# Altium PCB LI-PR_new.PcbDoc
Units mm, origin at the board's own origin, x right, y up, seen from the top; angles counter-clockwise.
Board outline 61.59 x 27.3 mm, 2 copper layers (Top Layer, Bottom Layer); 15 components, 10 nets, 51 pads, 502 vias.
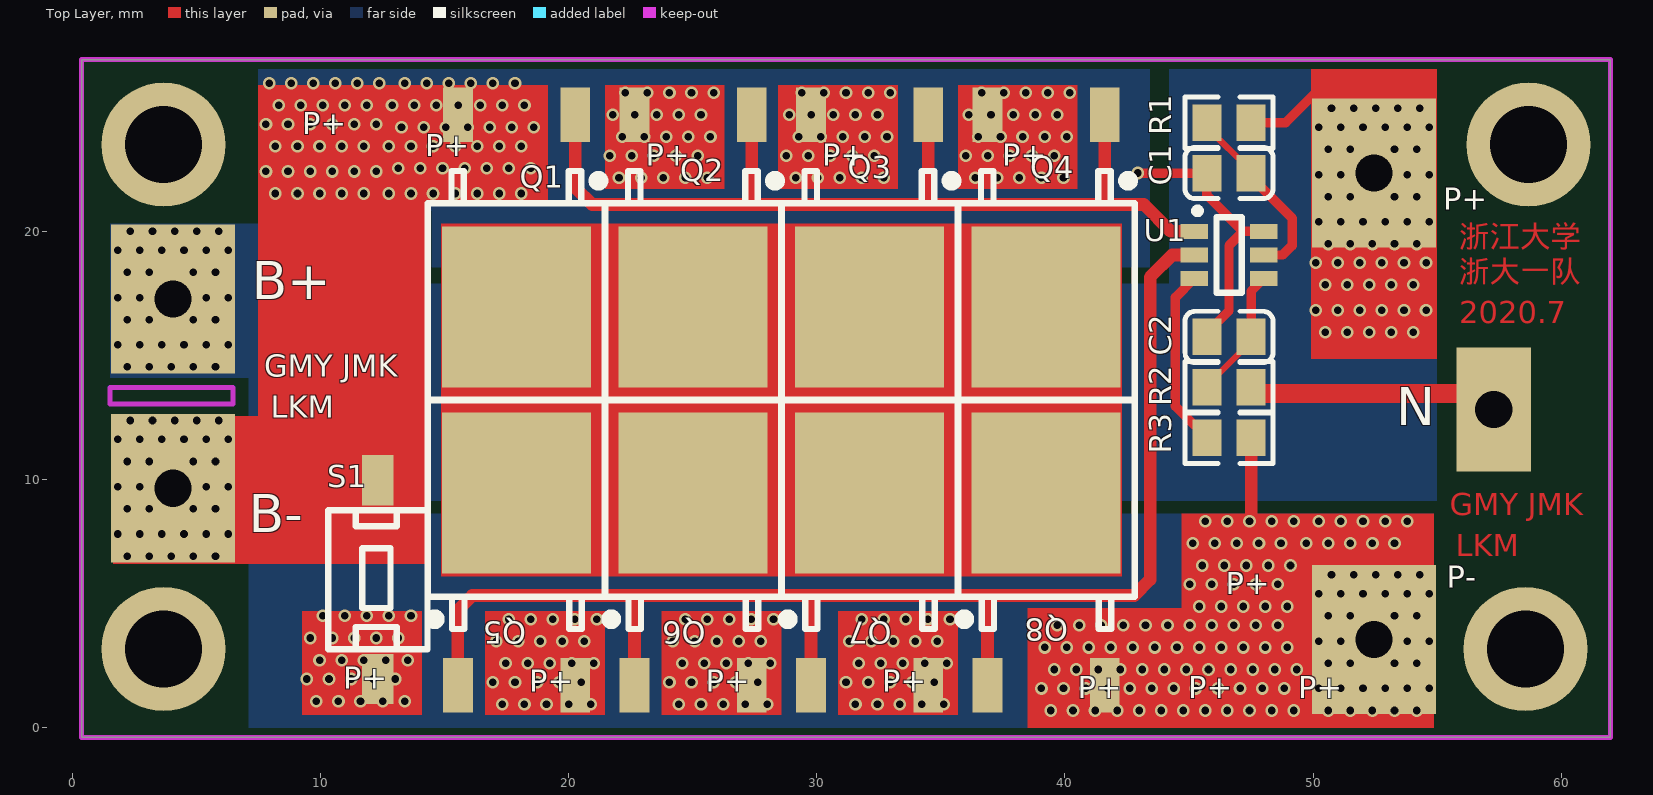
[diagram p0: Top Layer view]
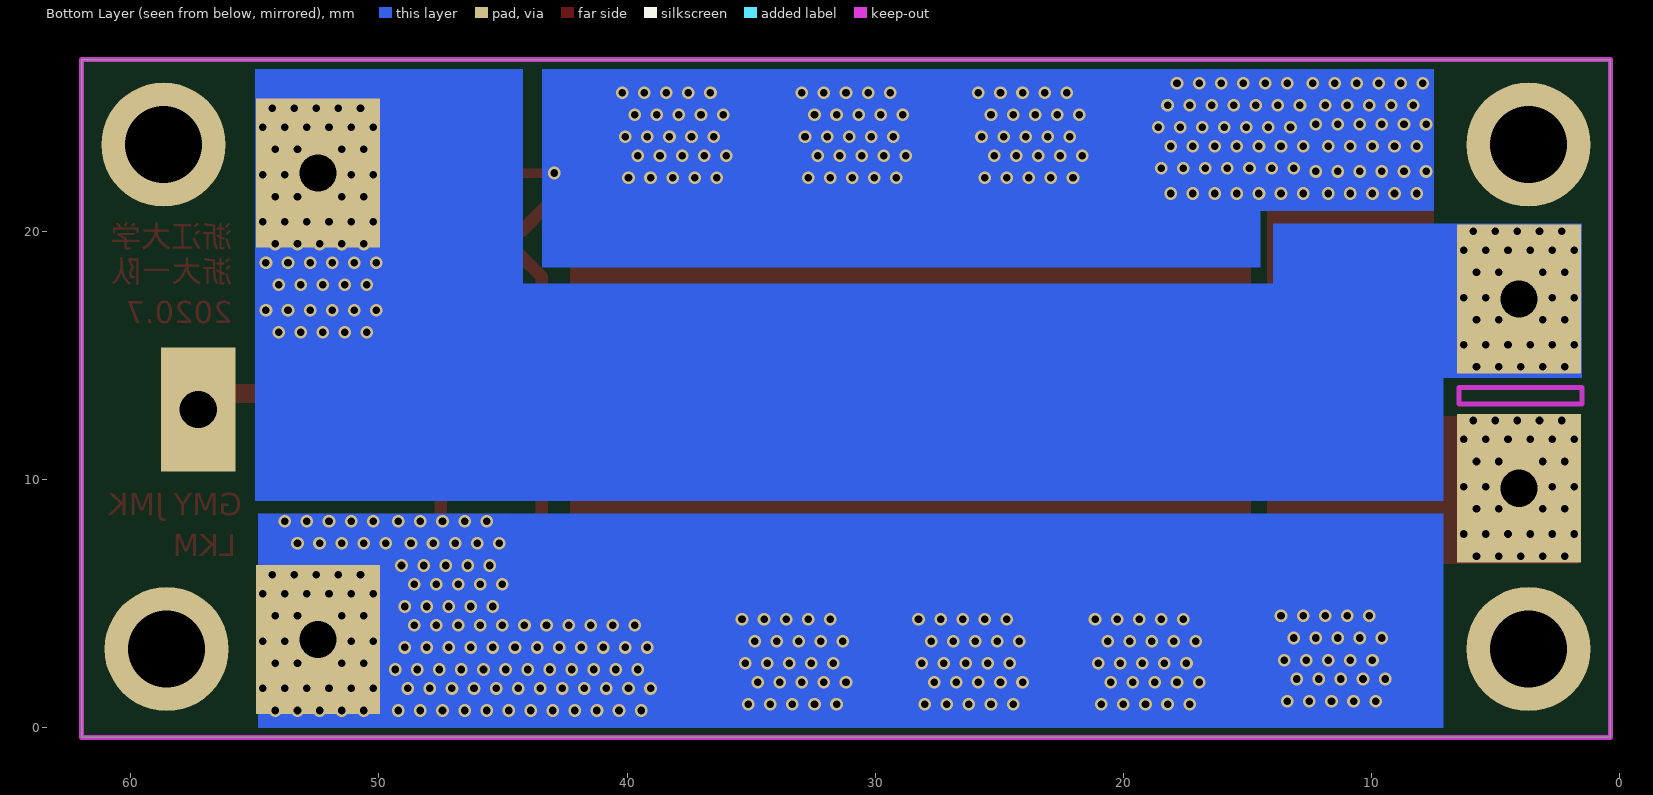
[diagram p1: Bottom Layer view, seen from below]

## Layer stack, top to bottom
Top Solder: solder mask 0.0102, Solder Resist, Dk 3.5
Top Layer: signal copper 0.0356
Dielectric1: dielectric 0.32, FR-4, Dk 4.8
Bottom Layer: signal copper 0.0356
Bottom Solder: solder mask 0.0102, Solder Resist, Dk 3.5

## Board outline
0.381,-0.381 0.381,26.924 61.976,26.924 61.976,-0.381

## Design rules (kind name [scope] priority, off if disabled: settings)
Clearance [All] p1: gap=0.254 ignorepadtopadclearanceinfootprint=FALSE except(0: Arc-Hole Track-Hole SMDPad-Hole THPad-Hole Via-Hole Fill-Hole Poly-Hole Region-Hole Text-Hole)
ComponentClearance [All] p1 off: gap=0.254 collisioncheckmode=3 verticalgap=2540 showdistances=FALSE
FabricationTestPointUsage TestPointUsage [All] p1: valid=0 allowmultiple=FALSE
FabricationTestpoint Testpoint [All] p1: side=3 testpointundercomponent=TRUE minsize=1.016 maxsize=2.54 preferedsize=1.524 minholesize=0 maxholesize=1.016 preferedholesize=0.813 testpointgrid=0.025 allowsidetop=TRUE allowsidebottom=TRUE usegrid=TRUE gridtolerance=0
MinimumSolderMaskSliver [All] p1: minsoldermaskwidth=0.076
PolygonConnect [All] p1: connectstyle=Relief reliefconductorwidth=0.254 reliefentries=4 polygonreliefangle="90 Angle" airgapwidth=0.254
RoutingVias [All] p1: holewidth=0.711 width=1.27 viastyle="Through Hole" minholewidth=0.254 minwidth=0.254 maxholewidth=2.54 maxwidth=2.54
SilkToSilkClearance [All] p1: silktosilkclearance=0
SilkToSolderMaskClearance SilkscreenOverComponentPads [IsPad] p1: minsilkscreentomaskgap=0 clearancetoexposedcopper=TRUE
SolderMaskExpansion [All] p1: expansion=0.102
Width [All] p1: maxlimit=25.4 minlimit=0.254 preferedwidth=0.254 minimp=50.000000 maximp=50.000000 favimp=50.000000
24 further rules are at their usual default settings.

## Components (designator, comment, footprint, x,y, rotation, side; value= is the part's Value field where it differs from the comment)
C1 "0.1u" CAP_0805C 46.609,22.352 r0 top
C2 "0.1u" CAP_0805C 46.609,15.748 r0 top
Q1 "3080N" 252-2 17.907,17.526 r0 top
Q2 "3080N" 252-2 25.019,17.526 r0 top
Q3 "3080N" 252-2 32.131,17.526 r0 top
Q4 "3080N" 252-2 39.243,17.526 r0 top
Q5 "3080N" 252-2 17.907,8.89 r180 top
Q6 "3080N" 252-2 25.019,8.89 r180 top
Q7 "3080N" 252-2 32.131,8.89 r180 top
Q8 "3080N" 252-2 39.243,8.89 r180 top
R1 "R" R_0805R 46.609,24.384 r180 top
R2 "R" R_0805R 46.609,13.716 r180 top
R3 "R" R_0805R 46.609,11.684 r180 top
S1 "SW_PB" SW_BP 12.319,5.969 r270 top
U1 "HY2120" SOT-23-6 46.609,19.304 r0 top

## Footprints (in the part's own frame and the unit in brackets; to place one, negate y for a bottom-side part, rotate by r counter-clockwise, add the part's x,y. Pads: shape width x height; smd on the part's side, far side on the other; paste and mask are expansions set on the pad)
252-2 [mm]
  rect 1.2x2.2 smd: 1(2.362,7.178) 3(-2.362,7.173)
  rect 6x6.5 smd: 2(0,-0.574)
  silkscreen extent -3.57,-4.34 3.57,4.91
CAP_0805C [mm]
  rect 1.16x1.47 smd mask+0: 1(-0.89,0) 2(0.89,0)
  silkscreen extent -1.77,-1.04 1.77,1.04, body extent -1,-0.62 1,0.63, height 0.77
R_0805R [mm]
  rect 1.16x1.47 smd mask+0: 1(-0.89,0) 2(0.89,0)
  silkscreen extent -1.77,-1.04 1.77,1.03, body extent -1,-0.62 1,0.63, height 0.49
SOT-23-6 [mm]
  rect 1.1x0.6 smd: 1(-1.4,0.696) 2(-1.4,-0.254) 3(-1.4,-1.204) 4(1.4,-1.204) 5(1.4,-0.254) 6(1.4,0.696)
  silkscreen extent -1.4,-1.78 0.51,1.65
SW_BP [mm]
  rect 2.032x1.27 smd: 1(-4,0) 2(4,0)
  silkscreen extent -2.8,-2 2.8,2

## Part data
C1 C2: library part CAP2
Q1 Q2 Q3 Q4 Q5 Q6 Q7 Q8: library part LR7843
R1 R2 R3: library part Res2

## Free pads (board coordinates)
  round 5 hole 3.1: 0(3.683,23.495) 0(58.547,3.175) 0(58.674,23.495) 1(3.683,3.175)
  rect 5x6 hole 1.5: 3(4.064,9.652) 3(4.064,17.272) 3(52.451,3.556) 3(52.451,22.352)
  rect 3x5 hole 1.5: 3(57.277,12.827)

## Via types
v1: diameter 0.508, hole 0.305, Top Layer to Bottom Layer, 502 vias

## Nets (pads, with @x,y where several pads share a name; then routed paths per layer and width w, separated by ;. In a path a pad name is that pad's centre, name@x,y a point inside that pad or via, vN(x,y) a via of type N, cw(c..) or ccw(c..) an arc to the next point about the centre after c; other vN are vias at no path point)
B-: C1.1 C2.1 pad.3@4.064,9.652 Q1.3 Q2.3 Q3.3 Q4.3 S1.1 U1.6 | length 11.4
  Top Layer w0.381: v1(42.926,22.352) C1.1 45.719,21.459 47.178,20 ; C2.1 45.719,15.912 46.609,16.802 46.609,19.431 47.178,20 ; U1.6 47.178,20
  other v1: 2.222,6.921 3.111,6.921 4,6.921 4.889,6.921 5.779,6.921 1.841,7.81 2.73,7.81 3.619,7.81 4.508,7.81 5.397,7.81 6.286,7.81 2.222,8.826 3.111,8.826 4.889,8.826 5.779,8.826 1.841,9.716 2.73,9.716 5.397,9.716 6.286,9.716 2.222,10.731 3.111,10.731 4.889,10.731 5.779,10.731 1.841,11.62 2.73,11.62 3.619,11.62 4.508,11.62 5.397,11.62 6.286,11.62 2.349,12.383 3.238,12.383 4.127,12.383 5.016,12.383 5.905,12.383 8.191,21.526 9.08,21.526 9.97,21.526 10.858,21.526 11.747,21.526 12.763,21.526 13.652,21.526 14.541,21.526 15.43,21.526 16.319,21.526 17.209,21.526 18.098,21.526 22.034,22.162 22.924,22.162 23.812,22.162 24.701,22.162 25.59,22.162 29.146,22.162 30.035,22.162 30.924,22.162 31.813,22.162 32.703,22.162 36.386,22.162 37.274,22.162 38.163,22.162 39.052,22.162 39.941,22.162 7.81,22.415 8.7,22.415 9.588,22.415 10.477,22.415 11.367,22.415 12.255,22.415 13.144,22.543 14.034,22.543 14.922,22.543 15.811,22.543 16.7,22.543 17.59,22.543 18.479,22.543 21.653,23.05 22.543,23.05 23.431,23.05 24.32,23.05 25.209,23.05 28.765,23.05 29.654,23.05 30.543,23.05 31.432,23.05 32.322,23.05 36.005,23.05 36.893,23.05 37.782,23.05 38.672,23.05 39.56,23.05 8.191,23.431 9.08,23.431 9.97,23.431 10.858,23.431 11.747,23.431 12.763,23.431 13.652,23.431 14.541,23.431 15.43,23.431 16.319,23.431 17.209,23.431 18.098,23.431 22.162,23.812 23.05,23.812 23.939,23.812 24.828,23.812 25.717,23.812 29.273,23.812 30.162,23.812 31.051,23.812 31.941,23.812 32.829,23.812 36.512,23.812 37.401,23.812 38.291,23.812 39.179,23.812 40.069,23.812 13.271,24.194 14.16,24.194 15.05,24.194 15.938,24.194 16.828,24.194 17.716,24.194 18.605,24.194 7.81,24.32 8.7,24.32 9.588,24.32 10.477,24.32 11.367,24.32 12.255,24.32 21.78,24.701 22.669,24.701 23.558,24.701 24.447,24.701 25.336,24.701 28.892,24.701 29.781,24.701 30.67,24.701 31.559,24.701 32.448,24.701 36.131,24.701 37.02,24.701 37.91,24.701 38.798,24.701 39.688,24.701 8.319,25.082 9.207,25.082 10.096,25.082 10.986,25.082 11.874,25.082 12.89,25.082 13.779,25.082 14.668,25.082 15.557,25.082 16.447,25.082 17.335,25.082 18.224,25.082 22.288,25.59 23.177,25.59 24.066,25.59 24.956,25.59 25.845,25.59 29.4,25.59 30.29,25.59 31.178,25.59 32.067,25.59 32.956,25.59 36.639,25.59 37.529,25.59 38.417,25.59 39.306,25.59 40.195,25.59 7.938,25.971 8.826,25.971 9.716,25.971 10.604,25.971 11.493,25.971 12.383,25.971 13.399,25.971 14.287,25.971 15.176,25.971 16.066,25.971 16.954,25.971 17.843,25.971
N: pad.3@57.277,12.827 R2.1 | length 10.1
  Top Layer w0.762: R2.1 47.753,13.462 56.642,13.462 pad.3@57.277,12.827
NetC1_2: C1.2 R1.2 U1.5 | length 7.3
  Top Layer w0.254: R1.2@45.719,24.206 47.499,22.426 C1.2
  Top Layer w0.381: C1.2@47.499,22.187 49.149,20.537 49.149,19.431 48.768,19.05 U1.5
NetC2_2: C2.2 R2.2 U1.4 | length 5.2
  Top Layer w0.254: R2.2 45.719,13.79 C2.2@47.499,15.57
  Top Layer w0.381: C2.2 47.499,17.59 U1.4
NetQ1_1: Q1.1 Q2.1 Q3.1 Q4.1 U1.1 | length 39.5
  Top Layer w0.508: Q1.1 20.269,21.768 20.955,21.082 43.18,21.082 44.262,20 U1.1 ; 27.381,21.082 Q2.1 ; 34.493,21.082 Q3.1 ; 41.605,21.082 Q4.1
NetQ1_2: Q1.2 Q2.2 Q3.2 Q4.2 Q5.2 Q6.2 Q7.2 Q8.2
NetQ5_1: Q5.1 Q6.1 Q7.1 Q8.1 U1.2 | length 56.6
  Top Layer w0.508: Q5.1 15.545,4.75 16.129,5.334 42.799,5.334 43.434,5.969 43.434,18.161 44.323,19.05 U1.2 ; Q6.1 22.657,5.334 ; Q7.1 29.769,5.334 ; Q8.1 36.881,5.334
NetR3_2: R3.2 U1.3 | length 7.3
  Top Layer w0.381: U1.3 44.45,17.341 44.45,12.953 R3.2
P+: pad.3@4.064,17.272 pad.3@52.451,22.352 R1.1 | length 3.2
  Top Layer w0.381: R1.1 48.895,24.384 50.165,25.654
  other v1: 2.222,14.541 3.111,14.541 4,14.541 4.889,14.541 5.779,14.541 1.841,15.43 2.73,15.43 3.619,15.43 4.508,15.43 5.397,15.43 6.286,15.43 50.482,15.938 51.371,15.938 52.261,15.938 53.149,15.938 54.038,15.938 2.222,16.447 3.111,16.447 4.889,16.447 5.779,16.447 50.102,16.828 50.99,16.828 51.88,16.828 52.768,16.828 53.657,16.828 54.546,16.828 1.841,17.335 2.73,17.335 5.397,17.335 6.286,17.335 50.482,17.843 51.371,17.843 52.261,17.843 53.149,17.843 54.038,17.843 2.222,18.351 3.111,18.351 4.889,18.351 5.779,18.351 50.102,18.732 50.99,18.732 51.88,18.732 52.768,18.732 53.657,18.732 54.546,18.732 1.841,19.241 2.73,19.241 3.619,19.241 4.508,19.241 5.397,19.241 6.286,19.241 50.609,19.494 51.498,19.494 52.387,19.494 53.276,19.494 54.165,19.494 2.349,20.002 3.238,20.002 4.127,20.002 5.016,20.002 5.905,20.002 50.228,20.383 51.117,20.383 52.006,20.383 52.895,20.383 53.785,20.383 54.673,20.383 50.609,21.399 51.498,21.399 53.276,21.399 54.165,21.399 50.228,22.288 51.117,22.288 53.785,22.288 54.673,22.288 50.609,23.304 51.498,23.304 53.276,23.304 54.165,23.304 50.228,24.194 51.117,24.194 52.006,24.194 52.895,24.194 53.785,24.194 54.673,24.194 50.736,24.956 51.625,24.956 52.514,24.956 53.404,24.956 54.292,24.956
P-: pad.3@52.451,3.556 Q5.3 Q6.3 Q7.3 Q8.3 R3.1 S1.2 | length 3.7
  Top Layer w0.508: 47.499,8.002 R3.1
  other v1: 39.433,0.699 40.322,0.699 41.212,0.699 42.1,0.699 42.989,0.699 43.878,0.699 44.767,0.699 45.657,0.699 46.545,0.699 47.434,0.699 48.323,0.699 49.212,0.699 50.609,0.699 51.498,0.699 52.387,0.699 53.276,0.699 54.165,0.699 17.335,0.953 18.224,0.953 19.113,0.953 20.002,0.953 20.892,0.953 24.447,0.953 25.336,0.953 26.226,0.953 27.114,0.953 28.003,0.953 31.559,0.953 32.448,0.953 33.337,0.953 34.227,0.953 35.115,0.953 9.842,1.079 10.731,1.079 11.62,1.079 12.509,1.079 13.399,1.079 39.052,1.587 39.941,1.587 40.831,1.587 41.719,1.587 42.608,1.587 43.497,1.587 44.386,1.587 45.276,1.587 46.164,1.587 47.053,1.587 47.942,1.587 48.831,1.587 50.228,1.587 51.117,1.587 52.006,1.587 52.895,1.587 53.785,1.587 54.673,1.587 16.954,1.841 17.843,1.841 18.732,1.841 19.621,1.841 20.511,1.841 24.066,1.841 24.956,1.841 25.845,1.841 26.733,1.841 27.622,1.841 31.178,1.841 32.067,1.841 32.956,1.841 33.846,1.841 34.734,1.841 9.461,1.968 10.351,1.968 11.239,1.968 12.128,1.968 13.018,1.968 39.56,2.349 40.45,2.349 41.338,2.349 42.227,2.349 43.116,2.349 44.005,2.349 44.895,2.349 45.783,2.349 46.672,2.349 47.561,2.349 48.45,2.349 49.34,2.349 17.462,2.603 18.351,2.603 19.241,2.603 20.13,2.603 21.018,2.603 24.575,2.603 25.463,2.603 26.352,2.603 27.241,2.603 28.13,2.603 31.686,2.603 32.575,2.603 33.465,2.603 34.353,2.603 35.242,2.603 50.609,2.603 51.498,2.603 53.276,2.603 54.165,2.603 9.97,2.73 10.858,2.73 11.747,2.73 12.636,2.73 13.525,2.73 39.179,3.238 40.069,3.238 40.957,3.238 41.846,3.238 42.735,3.238 43.624,3.238 44.514,3.238 45.402,3.238 46.291,3.238 47.18,3.238 48.069,3.238 48.959,3.238 17.081,3.492 17.97,3.492 18.86,3.492 19.748,3.492 20.637,3.492 24.194,3.492 25.082,3.492 25.971,3.492 26.86,3.492 27.749,3.492 31.305,3.492 32.194,3.492 33.084,3.492 33.972,3.492 34.861,3.492 50.228,3.492 51.117,3.492 53.785,3.492 54.673,3.492 9.588,3.619 10.477,3.619 11.367,3.619 12.255,3.619 13.144,3.619 39.688,4.127 40.576,4.127 41.465,4.127 42.355,4.127 43.243,4.127 44.133,4.127 45.021,4.127 45.91,4.127 46.799,4.127 47.688,4.127 48.578,4.127 17.59,4.381 18.479,4.381 19.367,4.381 20.256,4.381 21.145,4.381 24.701,4.381 25.59,4.381 26.479,4.381 27.368,4.381 28.258,4.381 31.813,4.381 32.703,4.381 33.591,4.381 34.48,4.381 35.369,4.381 10.096,4.508 10.986,4.508 11.874,4.508 12.763,4.508 13.652,4.508 50.609,4.508 51.498,4.508 53.276,4.508 54.165,4.508 45.402,4.889 46.291,4.889 47.18,4.889 48.069,4.889 48.959,4.889 50.228,5.397 51.117,5.397 52.006,5.397 52.895,5.397 53.785,5.397 54.673,5.397 45.021,5.779 45.91,5.779 46.799,5.779 47.688,5.779 48.578,5.779 50.736,6.159 51.625,6.159 52.514,6.159 53.404,6.159 54.292,6.159 45.529,6.54 46.419,6.54 47.307,6.54 48.197,6.54 49.085,6.54 45.148,7.429 46.038,7.429 46.926,7.429 47.816,7.429 48.704,7.429 49.721,7.429 50.609,7.429 51.498,7.429 52.387,7.429 53.276,7.429 45.657,8.319 46.545,8.319 47.434,8.319 48.323,8.319 49.212,8.319 50.228,8.319 51.117,8.319 52.006,8.319 52.895,8.319 53.785,8.319

## Keep-outs
Keep-Out Layer:
  lines w0.2: 0.381,-0.381 0.381,26.924 61.976,26.924 61.976,-0.381 0.381,-0.381 ; 1.524,13.049 6.477,13.049 6.477,13.716 1.524,13.716 1.524,13.049

## Other copper
Top Layer:
  rectangle net P-: 9.271,0.508 14.097,4.699
  rectangle net B-: 7.493,21.082 19.177,25.908
  rectangle net B-: 1.651,6.604 14.097,12.573
  rectangle net B-: 7.493,6.604 14.224,25.908
  rectangle net P-: 30.861,0.508 35.687,4.699
  rectangle net P-: 23.749,0.508 28.575,4.699
  rectangle net P-: 16.637,0.508 21.463,4.699
  rectangle net B-: 35.687,21.717 40.513,25.908
  rectangle net B-: 28.448,21.717 33.274,25.908
  rectangle net B-: 21.463,21.717 26.289,25.908
  rectangle net P-: 38.481,0 54.864,4.826
  rectangle net P-: 44.704,0 54.864,8.636
  rectangle net P+: 49.911,14.859 54.991,26.543
  rectangle net NetQ1_2: 14.859,6.096 42.291,20.32
  text "浙江大学" at 55.879,19.05 h1.52
  text "浙大一队" at 55.879,17.653 h1.52
  text "2020.7" at 55.88,16.002 h1.52
  text "GMY JMK" at 55.499,8.255 h1.52
  text "LKM" at 55.752,6.604 h1.52
Bottom Layer:
  rectangle net P-: 7.112,0 54.864,8.636
  rectangle net B-: 14.478,18.542 43.434,26.543
  rectangle net B-: 7.493,20.828 43.434,26.543
  rectangle net P+: 44.196,9.779 54.991,26.543
  rectangle net P+: 7.112,9.144 54.991,17.907
  rectangle net P+: 7.112,10.033 13.97,20.32
  rectangle net P+: 1.524,14.097 13.97,20.32

## Silkscreen, mask and mechanical layers (free items; w line width, h text height)
Top Overlay:
  text "P+" at 9.271,23.622 h1.52
  text "P+" at 14.224,22.733 h1.52
  text "P+" at 23.114,22.352 h1.52
  text "P+" at 30.226,22.352 h1.52
  text "P+" at 37.465,22.352 h1.52
  text "P+" at 55.245,20.574 h1.52
  text "B+" at 7.239,17.272 h1.52
  text "GMY JMK" at 7.747,13.843 h1.52
  text "LKM" at 8,12.192 h1.52
  text "N" at 53.34,12.192 h1.52
  text "B-" at 7.112,7.874 h1.52
  text "P-" at 55.372,5.334 h1.52
  text "P+" at 46.482,5.08 h1.52
  text "P+" at 10.922,1.27 h1.52
  text "P+" at 18.415,1.143 h1.52
  text "P+" at 25.527,1.143 h1.52
  text "P+" at 32.639,1.143 h1.52
  text "P+" at 40.513,0.889 h1.52
  text "P+" at 44.958,0.889 h1.52
  text "P+" at 49.403,0.889 h1.52